# Altium PCB PCB_TrafficLight.PcbDoc
Units mm, origin at the board's own origin, x right, y up, seen from the top; angles counter-clockwise.
Board outline 55.88 x 51.56 mm, 2 copper layers (Top Layer, Bottom Layer); 45 components, 38 nets, 215 pads, 9 vias.
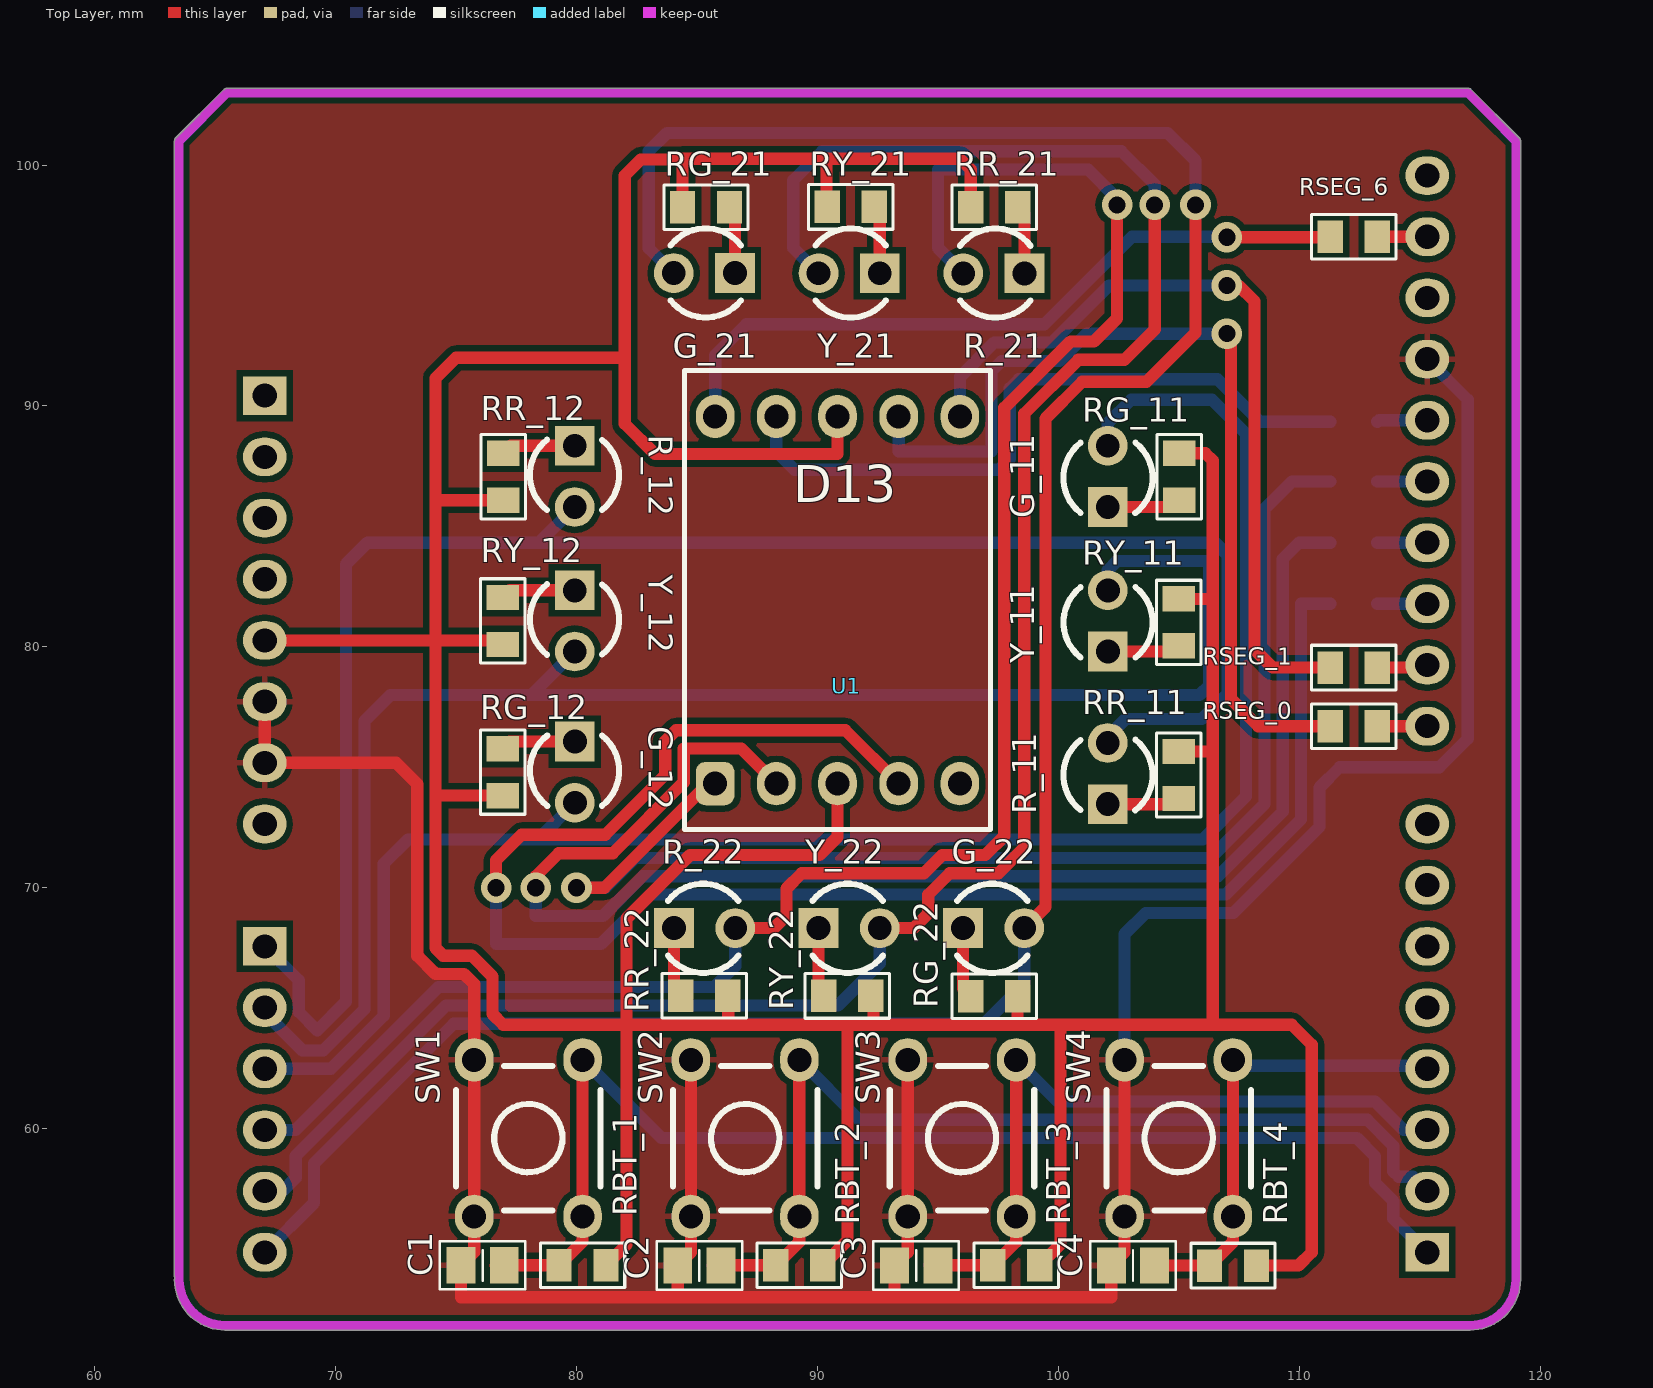
[diagram p0: Top Layer view]
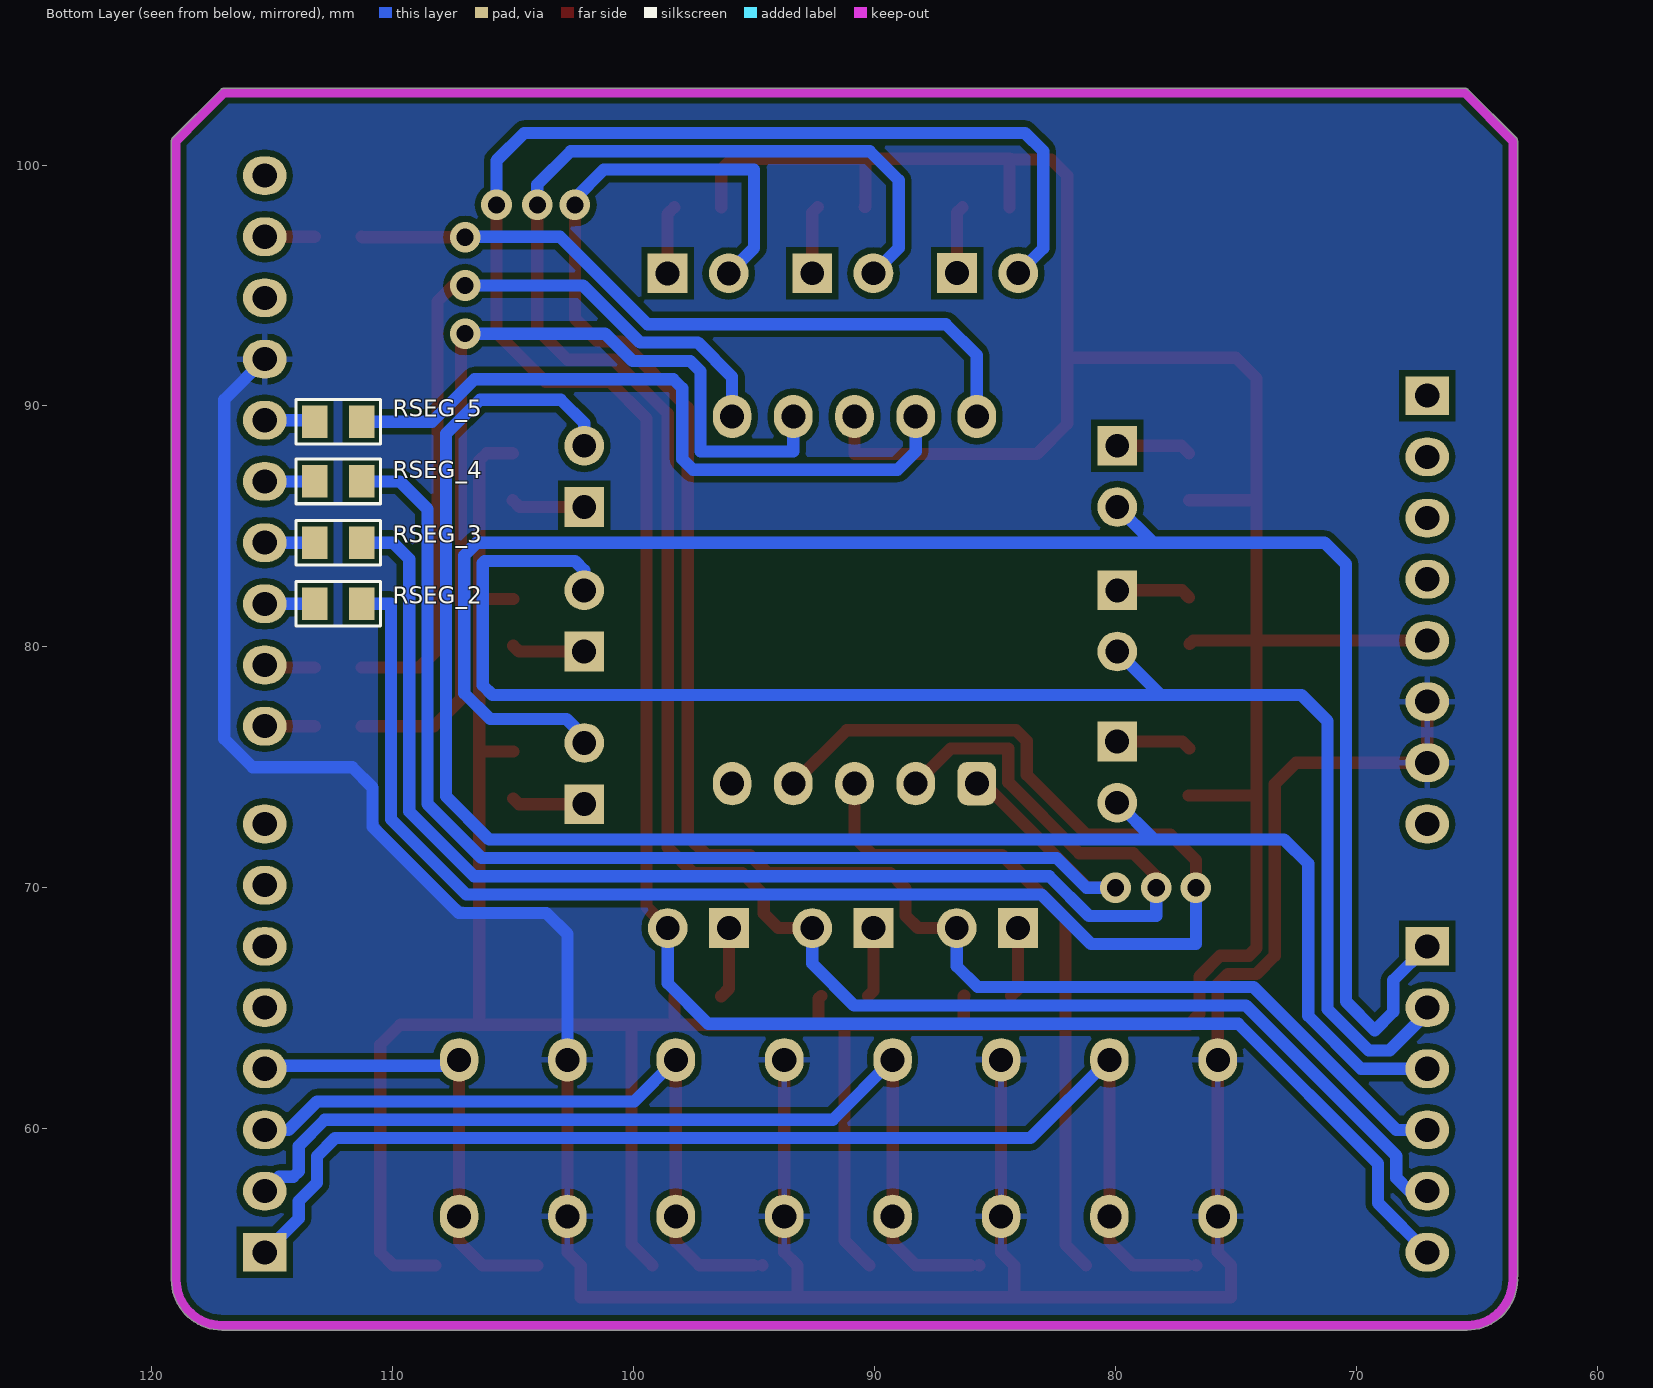
[diagram p1: Bottom Layer view, seen from below]
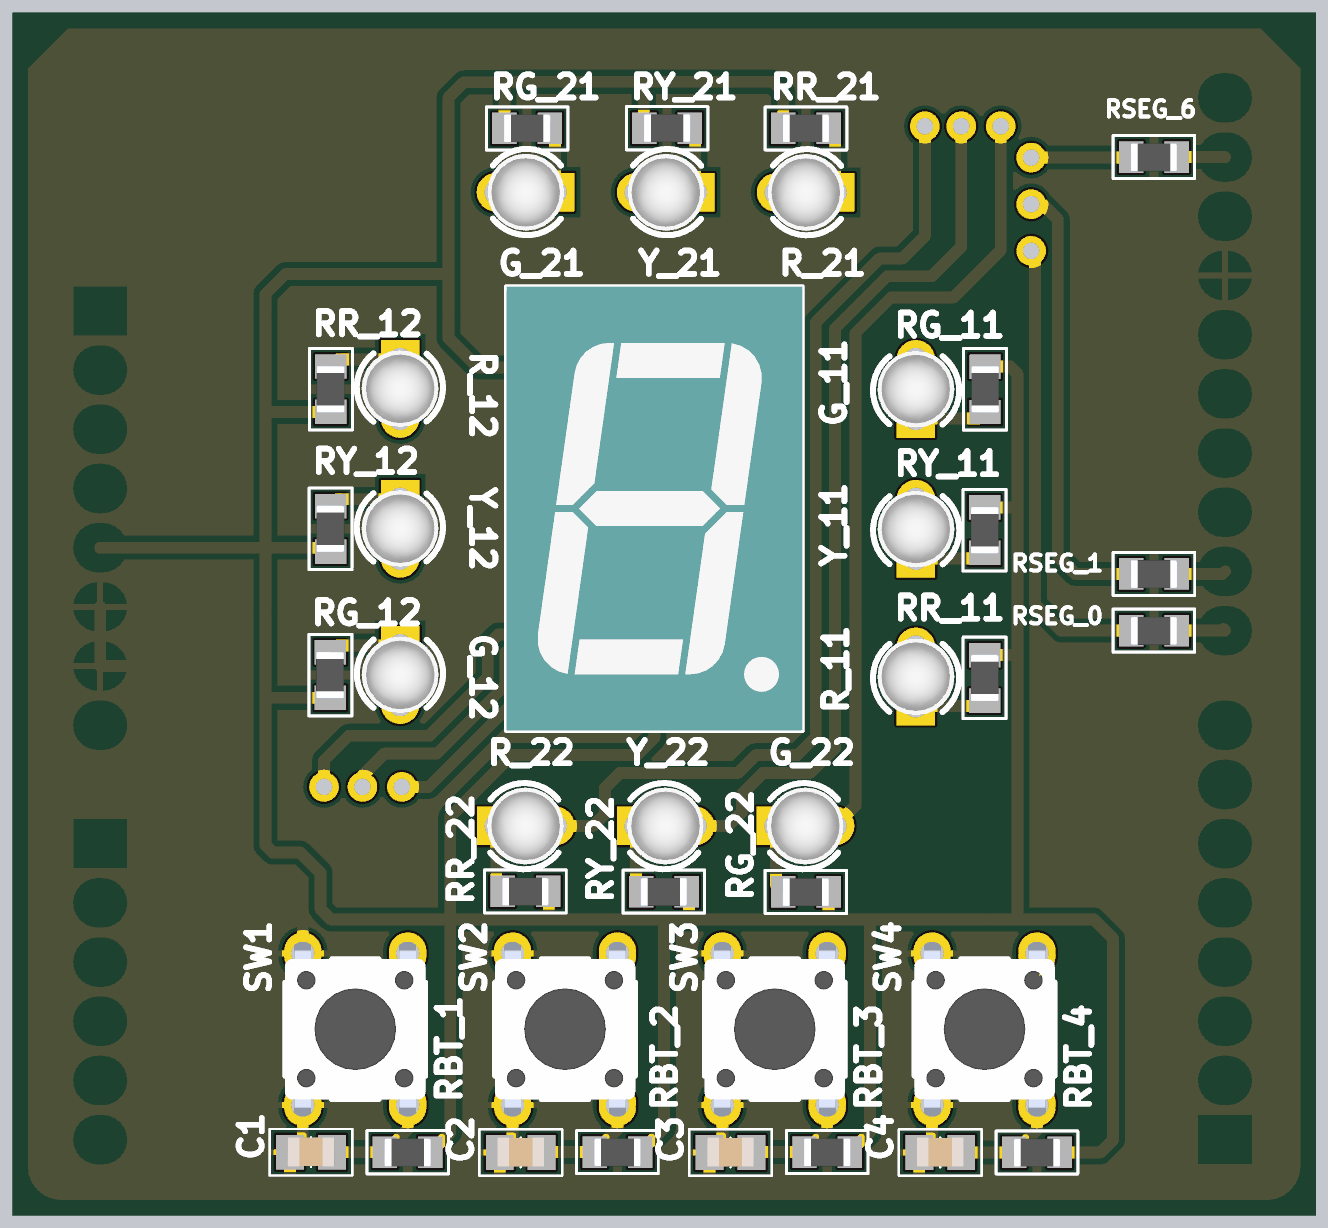
[diagram p2: 3D render of the assembled board from above, using the file's embedded part models]
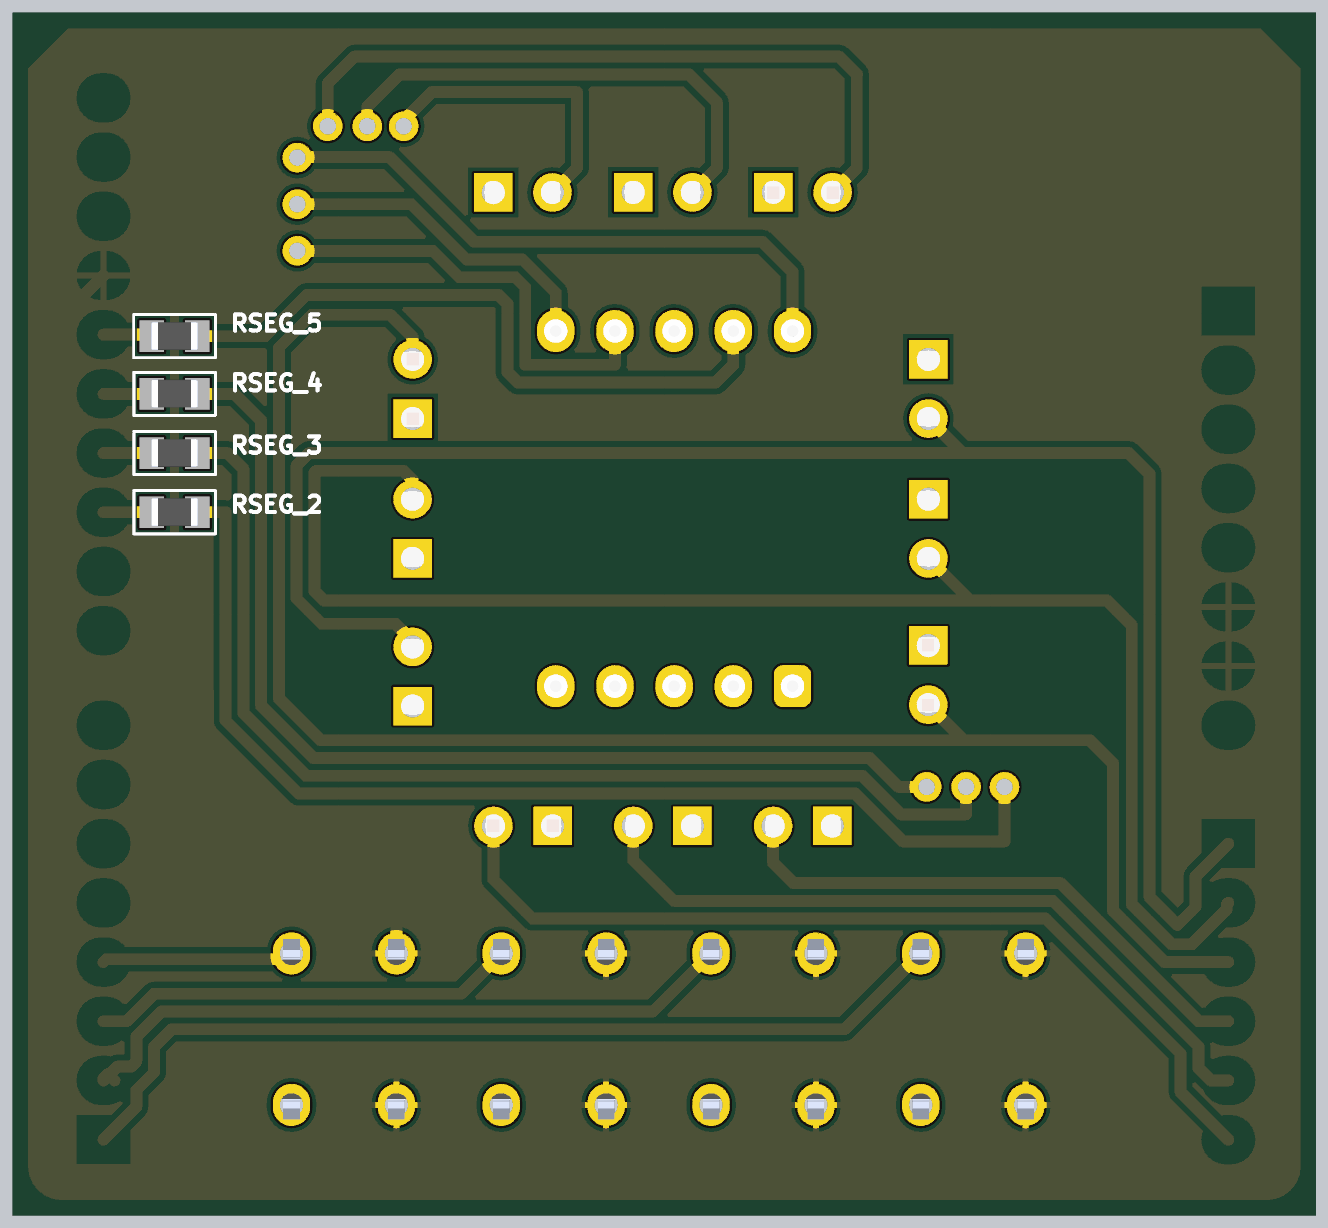
[diagram p3: 3D render of the assembled board from below, using the file's embedded part models]

## Layer stack, top to bottom
Top Solder: solder mask 0.0102, Solder Resist, Dk 3.5
Top Layer: signal copper 0.0356
Dielectric 1: dielectric 0.32, FR-4, Dk 4.8
Bottom Layer: signal copper 0.0356
Bottom Solder: solder mask 0.0102, Solder Resist, Dk 3.5

## Board outline
63.309,53.729 cw(c63.5,53.729) 63.322,53.797 cw(c63.5,53.865) 63.309,53.865 63.309,101 cw(c63.5,101) 63.365,101.135 cw(c63.5,101) 63.365,101.135 65.365,103.135 ccw(c65.5,103) 65.365,103.135 cw(c65.5,103) 65.5,103.191 79,103.191 117,103.191 cw(c117,103) 117.135,103.135 cw(c117,103) 117.135,103.135 119.135,101.135 ccw(c119,101) 119.135,101.135 cw(c119,101) 119.191,101 119.191,53.729 cw(c117.095,53.729) 117.095,51.633 65.405,51.633 cw(c65.405,53.729)

## Design rules (kind name [scope] priority, off if disabled: settings)
Clearance [All] p1: gap=0.254 ignorepadtopadclearanceinfootprint=FALSE
PolygonConnect [All] p1: connectstyle=Relief reliefconductorwidth=0.254 reliefentries=4 polygonreliefangle="90 Angle" airgapwidth=0.254
RoomDefinition SCH_TrafficLight [InComponentClass('SCH_TrafficLight')] p1: confinementstyle=ConfineIn formatcopy=TRUE lockcomponents=FALSE outline 0,0 50.8,0 50.8,25.4 0,25.4
RoutingVias [All] p1: holewidth=0.711 width=1.27 viastyle="Through Hole" minholewidth=0.711 minwidth=1.27 maxholewidth=0.711 maxwidth=1.27
SolderMaskExpansion [All] p1: expansion=0.102
Width [All] p1: maxlimit=2.54 minlimit=0.254 preferedwidth=0.508
30 further rules are at their usual default settings.

## Components (designator, comment, footprint, x,y, rotation, side; value= is the part's Value field where it differs from the comment)
C1 "C" "C 0805" 76.1,54.324 r180 top
C2 "C" "C 0805" 85.1,54.314 r180 top
C3 "C" "C 0805" 94.1,54.314 r180 top
C4 "C" "C 0805" 103.1,54.314 r180 top
D13 "SM410563N" LED/7SEG/0.56 85.754,74.32 r0 top locked
G_11 "Led" "LED 3MM - green" 102.052,87.074 r90 top
G_12 "Led" "LED 3MM - green" 79.929,74.798 r270 top
G_21 "Led" "LED 3MM - green" 85.306,95.512 r180 top
G_22 "Led" "LED 3MM - green" 97.316,68.325 r0 top
R_11 "Led" "LED 3MM - red" 102.052,74.738 r90 top
R_12 "Led" "LED 3MM - red" 79.924,87.074 r270 top
R_21 "Led" "LED 3MM - red" 97.325,95.504 r180 top
R_22 "Led" "LED 3MM - red" 85.316,68.325 r0 top
RBT_1 "R" "R 0805" 80.25,54.324 r0 top
RBT_2 "R" "R 0805" 89.25,54.33 r0 top
RBT_3 "R" "R 0805" 98.25,54.33 r0 top
RBT_4 "R" "R 0805" 107.25,54.314 r0 top
RG_11 "R" "R 0805" 105.02,87.06 r90 top
RG_12 "R" "R 0805" 76.933,74.798 r270 top
RG_21 "R" "R 0805" 85.375,98.25 r180 top
RG_22 "R" "R 0805" 97.335,65.496 r0 top
RR_11 "R" "R 0805" 105,74.678 r90 top
RR_12 "R" "R 0805" 76.952,87.063 r270 top
RR_21 "R" "R 0805" 97.339,98.25 r180 top
RR_22 "R" "R 0805" 85.302,65.515 r0 top
RSEG_0 "R" "R 0805" 112.268,76.704 r0 top
RSEG_1 "R" "R 0805" 112.269,79.14 r0 top
RSEG_2 "R" "R 0805" 112.268,81.784 r0 bottom
RSEG_3 "R" "R 0805" 112.268,84.324 r0 bottom
RSEG_4 "R" "R 0805" 112.268,86.864 r0 bottom
RSEG_5 "R" "R 0805" 112.269,89.339 r0 bottom
RSEG_6 "R" "R 0805" 112.268,97.024 r0 top
RY_11 "R" "R 0805" 105,81.014 r90 top
RY_12 "R" "R 0805" 76.942,81.074 r270 top
RY_21 "R" "R 0805" 91.38,98.26 r180 top
RY_22 "R" "R 0805" 91.241,65.505 r0 top
SW1 "Button" SW/4/06MM 78,59.604 r0 top
SW2 "Button" SW/4/06MM 87,59.604 r0 top
SW3 "Button" SW/4/06MM 96,59.604 r0 top
SW4 "Button" SW/4/06MM 105,59.604 r0 top
U1 "NUCLEO-F103RB" NUCLEO 56.186,51.824 r0 top locked
Y_11 "Led" "LED 3MM - yellow" 102.057,81.074 r90 top
Y_12 "Led" "LED 3MM - yellow" 79.924,81.074 r270 top
Y_21 "Led" "LED 3MM - yellow" 91.32,95.508 r180 top
Y_22 "Led" "LED 3MM - yellow" 91.316,68.325 r0 top

## Footprints (in the part's own frame and the unit in brackets; to place one, negate y for a bottom-side part, rotate by r counter-clockwise, add the part's x,y. Pads: shape width x height; smd on the part's side, far side on the other; paste and mask are expansions set on the pad)
"C 0805" [mm] "Chip Capacitor, 2-Leads, Body 2.0x1.3mm, IPC Medium Density"
  rect 1.2x1.5 smd: 1(-0.9,0) 2(0.9,0)
  silkscreen extent -1.78,-1 1.78,1, body extent -1,-0.64 1,0.61, height 0.6
"LED 3MM - green" [mil]
  rect 65x65 hole 39: 1(-50,0)
  round 65 hole 39: 2(50,0)
  silkscreen extent -60,-73 55,72, body extent -66,-65 64,65, height 207
"LED 3MM - red" [mil]
  rect 65x65 hole 39: 1(-50,0)
  round 65 hole 39: 2(50,0)
  silkscreen extent -60,-73 55,72, body extent -66,-65 64,65, height 207
"LED 3MM - yellow" [mil]
  rect 65x65 hole 39: 1(-50,0)
  round 65 hole 39: 2(50,0)
  silkscreen extent -60,-73 55,72, body extent -66,-65 64,65, height 207
LED/7SEG/0.56 [mm]
  rrect50% 1.6x1.8 hole 1: 1(0,0)
  oval 1.6x1.8 hole 1: 2(2.54,0) 3(5.08,0) 4(7.62,0) 5(10.16,0) 6(10.16,15.24) 7(7.62,15.24) 8(5.08,15.24) 9(2.54,15.24) 10(0,15.24)
  silkscreen extent -1.27,-1.91 11.43,17.14, body extent -1.27,-1.91 11.43,17.14, height 8.03
NUCLEO [mm]
  oval 1.8x1.6 hole 1: A5_1(59.13,24.88) A5_2(59.13,27.42) A5_3(59.13,29.96) A5_4(59.13,32.5) A5_5(59.13,35.04) A5_6(59.13,37.58) A5_7(59.13,40.12) A5_8(59.13,42.66) A5_9(59.13,45.2) A5_10(59.13,47.74) A6_2(10.87,36.06) A6_3(10.87,33.52) A6_4(10.87,30.98) A6_5(10.87,28.44) A6_6(10.87,25.9) A6_7(10.87,23.36) A6_8(10.87,20.82) A8_2(10.87,13.2) A8_3(10.87,10.66) A8_4(10.87,8.12) A8_5(10.87,5.58) A8_6(10.87,3.04) A9_2(59.13,5.58) A9_3(59.13,8.12) A9_4(59.13,10.66) A9_5(59.13,13.2) A9_6(59.13,15.74) A9_7(59.13,18.28) A9_8(59.13,20.82)
  rect 1.8x1.6 hole 1: A6_1(10.87,38.6) A8_1(10.87,15.74) A9_1(59.13,3.04)
  round 0 smd paste+0 mask+0: HOLD(10.87,52.57) HOLD(43.89,0.5) HOLD(59.13,51.3) M7_1(3.25,48.76) M7_2(5.79,48.76) M7_3(3.25,46.22) M7_4(5.79,46.22) M7_5(3.25,43.68) M7_6(5.79,43.68) M7_7(3.25,41.14) M7_8(5.79,41.14) M7_9(3.25,38.6) M7_10(5.79,38.6) M7_11(3.25,36.06) M7_12(5.79,36.06) M7_13(3.25,33.52) M7_14(5.79,33.52) M7_15(3.25,30.98) M7_16(5.79,30.98) M7_17(3.25,28.44) M7_18(5.79,28.44) M7_19(3.25,25.9) M7_20(5.79,25.9) M7_21(3.25,23.36) M7_22(5.79,23.36) M7_23(3.25,20.82) M7_24(5.79,20.82) M7_25(3.25,18.28) M7_26(5.79,18.28) M7_27(3.25,15.74) M7_28(5.79,15.74) M7_29(3.25,13.2) M7_30(5.79,13.2) M7_31(3.25,10.66) M7_32(5.79,10.66) M7_33(3.25,8.12) M7_34(5.79,8.12) M7_35(3.25,5.58) M7_36(5.79,5.58) M7_37(3.25,3.04) M7_38(5.79,3.04) M10_1(64.21,48.76) M10_2(66.75,48.76) M10_3(64.21,46.22) M10_4(66.75,46.22) M10_5(64.21,43.68) M10_6(66.75,43.68) M10_7(64.21,41.14) M10_8(66.75,41.14) M10_9(64.21,38.6) M10_10(66.75,38.6) M10_11(64.21,36.06) M10_12(66.75,36.06) M10_13(64.21,33.52) M10_14(66.75,33.52) M10_15(64.21,30.98) M10_16(66.75,30.98) M10_17(64.21,28.44) M10_18(66.75,28.44) M10_19(64.21,25.9) M10_20(66.75,25.9) M10_21(64.21,23.36) M10_22(66.75,23.36) M10_23(64.21,20.82) M10_24(66.75,20.82) M10_25(64.21,18.28) M10_26(66.75,18.28) M10_27(64.21,15.74) M10_28(66.75,15.74) M10_29(64.21,13.2) M10_30(66.75,13.2) M10_31(64.21,10.66) M10_32(66.75,10.66) M10_33(64.21,8.12) M10_34(66.75,8.12) M10_35(64.21,5.58) M10_36(66.75,5.58) M10_37(64.21,3.04) M10_38(66.75,3.04)
  Keep-Out Layer lines w0.381: 7.314,1.905 ccw(c9.219,1.905) 9.219,0 11.46,0 48.46,0 60.909,0 ccw(c60.909,1.905) 62.814,1.905 62.814,49.176 61.814,50.176 60.814,51.176 41.062,51.176 29.314,51.176 22.814,51.176 ; 7.314,2.041 7.314,30.458 7.314,49.176 9.314,51.176 10.189,51.176 22.814,51.176 ; 22.814,51.176 22.814,51.176
"R 0805" [mm] "Chip Resistor, 2-Leads, Body 2.0x1.3mm, IPC Medium Density"
  rect 1.05x1.35 smd: 1(-0.975,0) 2(0.975,0)
  silkscreen extent -1.75,-0.92 1.75,0.92, body extent -1,-0.61 1,0.59, height 0.5
SW/4/06MM [mm]
  oval 1.6x1.8 hole 1: 1(-2.25,3.25) 2(-2.25,-3.25) 3(2.25,-3.25) 4(2.25,3.25)
  silkscreen extent -3,-3 3,3, body extent -3.01,-3.87 3.02,3.87, height 5.01

## Part data
C1 C2 C3 C4: library part "Capacitor NP", "Capacitor non-pol"
D13: library part "LED 7-SEG SM410563N", "SM410563N, Common-Anode, LED 7-seg, RED, 0.56\","
G_11 G_12 G_21 G_22 R_11 R_12 R_21 R_22 Y_11 Y_12 Y_21 Y_22: "Typical LED"
RBT_1 RBT_2 RBT_3 RBT_4 RG_11 RG_12 RG_21 RG_22 RR_11 RR_12 RR_21 RR_22 RSEG_0 RSEG_1 RSEG_2 RSEG_3 RSEG_4 RSEG_5 RSEG_6 RY_11 RY_12 RY_21 RY_22: library part Resistor, "Resistor"
SW1 SW2 SW3 SW4: library part "SW SPST 4-pin", "Tact switch 4-pin"
U1: "STM32F103RB, mbed-Enabled Development Nucleo-64 STM32F1 ARM® Cortex®-M3 MCU 32-Bit Embedded Evaluation Board", Manufacturer=STMicroelectronics, BRAND=STMicroelectronics, Manufacturer Product Number=NUCLEO-F103RB, PART NO=NUCLEO-F103RB, STOCK CODE=497-14362-ND, SUPPLIER=digi-key, TYPE="EVAL BRD"

## Via types
v1: diameter 1.27, hole 0.711, Top Layer to Bottom Layer, 9 vias

## Nets (pads, with @x,y where several pads share a name; then routed paths per layer and width w, separated by ;. In a path a pad name is that pad's centre, name@x,y a point inside that pad or via, vN(x,y) a via of type N, cw(c..) or ccw(c..) an arc to the next point about the centre after c; other vN are vias at no path point)
+5: D13.3 D13.8 RBT_1.2 RBT_2.2 RBT_3.2 RBT_4.2 RG_11.2 RG_12.2 RG_21.2 RG_22.2 RR_11.2 RR_12.2 RR_21.2 RR_22.2 RY_11.2 RY_12.2 RY_21.2 RY_22.2 U1.A6_5 | length 218.3
  Top Layer w0.508: U1.A6_5 74.146,80.264 ; 74.146,80.113 74.146,67.495 74.462,67.179 75.649,67.179 76.512,66.316 76.512,64.76 76.959,64.313 82,64.313 ; 74.16,73.823 RG_12.2 RG_12.2@76.962,73.823 ; RY_12.2@76.923,80.113 76.772,80.264 74.146,80.264 ; RR_12.2 74.146,86.088 ; RBT_1.2 82.075,55.174 82.075,64.238 82,64.313 ; 84.375,100.257 90.38,100.257 ; RG_21.2 84.4,100.232 82.668,100.232 82,99.564 82,92 ; RR_22.2 86.302,65.49 86.302,64.313 ; RBT_2.2 91.245,55.35 91.245,64.313 ; RY_21.2 90.38,98.26 90.38,100.257 ; D13.3 90.834,72.106 90.089,71.362 84.714,71.362 82.075,68.723 82.075,64.313 ; D13.8 90.834,88 83.256,88 82,89.256 82,92 ; RY_22.2 92.325,65.397 92.325,64.313 ; RR_21.2 96.364,99.809 95.916,100.257 90.38,100.257 ; RG_22.2 98.31,64.338 98.335,64.313 ; RBT_3.2 100.09,55.195 100.09,64.313 ; RR_11.2 106.388,75.653 106.407,75.672 ; RY_11.2 106.396,81.989 106.407,82 ; RG_11.2 106.103,88.035 106.407,87.731 106.407,82 ; RBT_4.2 109.968,54.314 110.518,54.864 110.518,63.482 109.687,64.313 106.413,64.313 ; 74.146,80.264 74.146,86.088 ; 74.146,86.088 74.146,91.149 74.996,92 82,92 ; 82,64.313 82.075,64.313 ; 82.075,64.313 86.302,64.313 ; 86.302,64.313 91.245,64.313 ; 91.245,64.313 92.325,64.313 ; 92.325,64.313 98.335,64.313 ; 98.335,64.313 100.09,64.313 ; 100.09,64.313 106.413,64.313 ; 106.407,75.672 106.413,75.678 106.413,64.313 ; 106.407,75.672 106.407,82
BTN1: C1.1 RBT_1.1 SW1.3 SW1.4 U1.A9_1 | length 51
  Top Layer w0.508: C1.1@76.65,54.314 C1.1@76.66,54.324 ; C1.1 RBT_1.1 80.25,55.299 SW1.3 SW1.4
  Bottom Layer w0.508: SW1.4@80.25,63.25 80.25,62.878 83.524,59.604 112.396,59.604 113.146,58.854 113.146,57.75 113.908,56.988 113.908,56.272 U1.A9_1
BTN2: C2.1 RBT_2.1 SW2.3 SW2.4 U1.A9_2 | length 40.9
  Top Layer w0.508: C2.1@85.65,54.314 C2.1@85.665,54.33 ; C2.1 86.015,54.33 RBT_2.1 89.25,55.305 SW2.3 SW2.4
  Bottom Layer w0.508: SW2.4 91.738,60.366 112.821,60.366 113.908,59.279 113.908,58.224 114.132,58 114.72,58 U1.A9_2@115.082,57.637 ; U1.A9_2@114.849,57.404 U1.A9_2@115.082,57.637 ; U1.A9_2@115.125,57.68 115.316,57.49 U1.A9_2 U1.A9_2@115.082,57.637
BTN3: C3.1 RBT_3.1 SW3.3 SW3.4 U1.A9_3 | length 29.9
  Top Layer w0.508: C3.1@94.65,54.314 C3.1@94.665,54.33 ; C3.1 95.015,54.33 RBT_3.1 98.25,55.305 SW3.3 SW3.4
  Bottom Layer w0.508: SW3.4@98.646,62.854 SW3.4 99.976,61.128 113.146,61.128 114.33,59.944 U1.A9_3
BTN4: C4.1 RBT_4.1 SW4.3 SW4.4 U1.A9_4 | length 20
  Top Layer w0.508: C4.1 RBT_4.1 107.25,55.289 107.25,56.75 SW4.4@107.25,63.25
  Bottom Layer w0.508: SW4.4@107.25,63.25 107.896,62.604 115.196,62.604 U1.A9_4
GND: C1.2 C2.2 C3.2 C4.2 SW1.1 SW1.2 SW2.1 SW2.2 SW3.1 SW3.2 SW4.1 SW4.2 U1.A5_7 U1.A6_6 U1.A6_7 | length 129.9
  Top Layer w0.508: U1.A6_6 U1.A6_7 72.505,75.184 73.384,74.305 73.384,67.179 74.146,66.417 75.333,66.417 75.75,66 SW1.1 SW1.2 75.75,54.874 C1.2 75.2,53 84.2,53 ; SW2.1 SW2.2 84.75,54.864 C2.2 84.2,53 ; SW3.1 SW3.2 93.75,54.864 C3.2 93.2,53 ; SW4.1 SW4.2 102.75,54.864 C4.2 102.2,53 93.2,53 ; 84.2,53 93.2,53
  Bottom Layer w0.508: SW4.1 102.75,68.075 103.627,68.952 107.263,68.952 110.84,72.529 110.84,74.16 111.68,75 115.816,75 117,76.184 117,90.26 U1.A5_7
GREEN1: G_11.2 G_12.2 U1.A8_3 | length 74
  Bottom Layer w0.508: U1.A8_3 69.801,62.484 72,64.683 72,71 73,72 106,72 107.792,73.792 107.792,88.845 106.376,90.26 103.026,90.26 102.052,89.286 G_11.2 ; 78.423,72.022 G_12.2
GREEN2: G_21.2 G_22.2 U1.A8_6 | length 105
  Top Layer w0.508: G_21.2 84.2,95.677 G_21.2@84.183,95.677 ; G_22.2 99.464,69.203 99.464,89.472 100.992,91 103.661,91 104.762,92.101 104.762,92.104 105.695,93.037 v1(105.695,98.345)
  Bottom Layer w0.508: U1.A8_6 69.101,56.909 69.101,58.551 74.899,64.349 96.909,64.349 98.59,66.03 G_22.2@98.59,68.325 ; G_21.2 83,96.548 83,100.571 82.989,100.571 83.751,101.333 104.544,101.333 105.695,100.182 v1(105.695,98.345)
NetD13_1: D13.1 RSEG_4.1 | length 53.1
  Top Layer w0.508: v1(80,70) 81.15,70 85.15,74 D13.1@86,74
  Bottom Layer w0.508: v1(80,70) 81.197,70 82.435,71.238 106.316,71.238 108.554,73.476 108.554,85.721 109.697,86.864 RSEG_4.1
NetD13_2: D13.2 RSEG_3.1 | length 60.3
  Top Layer w0.508: v1(78.308,70) 78.308,70.476 79.264,71.432 81.504,71.432 84.446,74.374 84.446,75.773 86.841,75.773 D13.2
  Bottom Layer w0.508: v1@78.308,69.524 78.308,68.822 81.096,68.822 82.75,70.476 106.631,70.476 109.316,73.161 109.316,83.64 110,84.324 RSEG_3.1
NetD13_4: D13.4 RSEG_2.1 | length 69.9
  Top Layer w0.508: v1(76.66,70) 76.66,71.136 77.718,72.194 81.189,72.194 83.684,74.689 83.684,76.088 84.13,76.535 91.159,76.535 D13.4
  Bottom Layer w0.508: v1(76.66,70) 76.66,67.66 81.011,67.66 83.066,69.714 106.947,69.714 110.078,72.845 110.078,81.784 RSEG_2.1
NetD13_6: D13.6 RSEG_1.1 | length 33.6
  Top Layer w0.508: v1(107,95) 107.484,95 108.143,94.341 108.143,79.886 108.889,79.14 RSEG_1.1
  Bottom Layer w0.508: D13.6 95.914,91.206 97.336,92.628 99.737,92.628 102.109,95 v1(107,95)
NetD13_7: D13.7 RSEG_0.1 | length 38.9
  Top Layer w0.508: v1(107,93) 107.169,92.831 107.169,77.831 108.296,76.704 RSEG_0.1
  Bottom Layer w0.508: D13.7 93.374,88.113 97.222,88.113 97.222,91.436 97.652,91.866 100.053,91.866 101.187,93 v1(107,93)
NetD13_9: D13.9 RSEG_5.1 | length 29.1
  Bottom Layer w0.508: D13.9 88.515,89.339 88.294,89.339 88.294,88.105 89.048,87.351 97.537,87.351 97.984,87.797 97.984,90.734 98.354,91.104 106.61,91.104 108.375,89.339 RSEG_5.1
NetD13_10: D13.10 RSEG_6.1 | length 30.1
  Top Layer w0.508: v1(107,97) 111.269,97 RSEG_6.1
  Bottom Layer w0.508: D13.10 85.754,92.101 87.042,93.39 99.422,93.39 103.056,97.024 106.976,97.024 v1(107,97)
NetG_11_1: G_11.1 RG_11.1 | length 3.1
  Top Layer w0.508: G_11.1 104.739,85.804 RG_11.1
NetG_12_1: G_12.1 RG_12.1 | length 3.1
  Top Layer w0.508: RG_12.1 77.228,76.068 G_12.1
NetG_21_1: G_21.1 RG_21.1 | length 2.8
  Top Layer w0.508: RG_21.1 86.576,98.025 G_21.1
NetG_22_1: G_22.1 RG_22.1 | length 3
  Top Layer w0.508: G_22.1 96.046,65.81 RG_22.1
NetR_11_1: R_11.1 RR_11.1 | length 3
  Top Layer w0.508: R_11.1 104.765,73.468 RR_11.1
NetR_12_1: R_12.1 RR_12.1 | length 3.1
  Top Layer w0.508: RR_12.1 77.258,88.344 R_12.1
NetR_21_1: R_21.1 RR_21.1 | length 2.9
  Top Layer w0.508: RR_21.1 98.595,97.969 R_21.1
NetR_22_1: R_22.1 RR_22.1 | length 2.9
  Top Layer w0.508: R_22.1 84.046,65.796 RR_22.1
NetRY_11_1: RY_11.1 Y_11.1 | length 3
  Top Layer w0.508: Y_11.1 104.765,79.804 RY_11.1
NetRY_12_1: RY_12.1 Y_12.1 | length 3.1
  Top Layer w0.508: RY_12.1 77.237,82.344 Y_12.1
NetRY_21_1: RY_21.1 Y_21.1 | length 2.8
  Top Layer w0.508: RY_21.1 92.59,98.025 Y_21.1
NetRY_22_1: RY_22.1 Y_22.1 | length 2.9
  Top Layer w0.508: Y_22.1 90.046,65.725 RY_22.1
RED1: R_11.2 R_12.2 U1.A8_1 | length 75.2
  Bottom Layer w0.508: U1.A8_1 68.464,66.156 68.464,64.849 69.237,64.075 70.434,65.272 70.434,83.434 71.324,84.324 78.445,84.324 ; R_12.2 78.445,84.324 ; R_11.2 102.052,76.267 102.785,77 105.956,77 107.03,78.074 107.03,83.795 106.501,84.324 78.445,84.324
RED2: R_21.2 R_22.2 U1.A8_4 | length 79
  Top Layer w0.508: R_22.2 88.2,68.325 88.713,68.838 88.713,69.965 89.348,70.6 94.418,70.6 95.18,71.362 96.97,71.362 97.76,72.152 97.76,89.923 100.511,92.674 101.484,92.674 102.439,93.629 v1(102.439,98.345)
  Bottom Layer w0.508: U1.A8_4 68.339,59.944 74.268,65.873 85.717,65.873 86.586,66.742 R_22.2 ; R_21.2 95,96.559 95,99.809 101.239,99.809 102.439,98.609 v1(102.439,98.345)
SEG0: RSEG_0.2 U1.A5_1 | length 2.1
  Top Layer w0.508: RSEG_0.2 115.183,76.704 115.25,76.77 U1.A5_1
SEG1: RSEG_1.2 U1.A5_2 | length 2.1
  Top Layer w0.508: RSEG_1.2 115.212,79.14 U1.A5_2
SEG2: RSEG_2.2 U1.A5_3 | length 2.1
  Bottom Layer w0.508: RSEG_2.2 U1.A5_3
SEG3: RSEG_3.2 U1.A5_4 | length 2.1
  Bottom Layer w0.508: RSEG_3.2 U1.A5_4
SEG4: RSEG_4.2 U1.A5_5 | length 2.1
  Bottom Layer w0.508: RSEG_4.2 U1.A5_5
SEG5: RSEG_5.2 U1.A5_6 | length 2.1
  Bottom Layer w0.508: RSEG_5.2 113.31,89.404 U1.A5_6
SEG6: RSEG_6.2 U1.A5_9 | length 2.1
  Top Layer w0.508: RSEG_6.2 U1.A5_9
YELLOW1: U1.A8_2 Y_11.2 Y_12.2 | length 66.2
  Bottom Layer w0.508: U1.A8_2 67.123,64.957 67.123,64.74 68.618,63.246 69.486,63.246 71.196,64.957 71.196,76.92 72.276,78 78.121,78 ; Y_12.2 78.121,78 ; Y_11.2 102.057,83.18 102.439,83.562 106.186,83.562 106.268,83.48 106.268,78.406 105.861,78 78.121,78
YELLOW2: U1.A8_5 Y_21.2 Y_22.2 | length 90.5
  Top Layer w0.508: Y_22.2 93.75,68.325 94,68.325 94.6,68.925 94.6,69.704 95.496,70.6 97.512,70.6 98.59,71.678 98.59,89.675 100.827,91.912 102.734,91.912 104,93.178 v1(104,98.345)
  Bottom Layer w0.508: U1.A8_5 67.8,57.404 68.339,57.943 68.339,58.866 74.584,65.111 90.849,65.111 92.59,66.852 Y_22.2@92.59,68.325 ; Y_21.2 89,96.558 89,99.37 90.201,100.571 102.616,100.571 104,99.187 v1(104,98.345)
pads on no net: D13.5 U1.A5_8 U1.A5_10 U1.A6_1 U1.A6_2 U1.A6_3 U1.A6_4 U1.A6_8 U1.A9_5 U1.A9_6 U1.A9_7 U1.A9_8 U1.HOLD U1.M7_1 U1.M7_2 U1.M7_3 U1.M7_4 U1.M7_5 U1.M7_6 U1.M7_7 U1.M7_8 U1.M7_9 U1.M7_10 U1.M7_11 U1.M7_12 U1.M7_13 U1.M7_14 U1.M7_15 U1.M7_16 U1.M7_17 U1.M7_18 U1.M7_19 U1.M7_20 U1.M7_21 U1.M7_22 U1.M7_23 U1.M7_24 U1.M7_25 U1.M7_26 U1.M7_27 U1.M7_28 U1.M7_29 U1.M7_30 U1.M7_31 U1.M7_32 U1.M7_33 U1.M7_34 U1.M7_35 U1.M7_36 U1.M7_37 U1.M7_38 U1.M10_1 U1.M10_2 U1.M10_3 U1.M10_4 U1.M10_5 U1.M10_6 U1.M10_7 U1.M10_8 U1.M10_9 U1.M10_10 U1.M10_11 U1.M10_12 U1.M10_13 U1.M10_14 U1.M10_15 U1.M10_16 U1.M10_17 U1.M10_18 U1.M10_19 U1.M10_20 U1.M10_21 U1.M10_22 U1.M10_23 U1.M10_24 U1.M10_25 U1.M10_26 U1.M10_27 U1.M10_28 U1.M10_29 U1.M10_30 U1.M10_31 U1.M10_32 U1.M10_33 U1.M10_34 U1.M10_35 U1.M10_36 U1.M10_37 U1.M10_38

## Polygon pours and split planes (outlines as drawn)
GND on Bottom Layer "Bottom Layer-GND" (solid, remove dead copper, pour order 8): 61,105 121,105 121,49 61,49
GND on Top Layer "Top Layer-GND" (solid, remove dead copper, pour order 6): 61.976,104.394 120.396,104.394 120.396,50 61.976,50